# Altium PCB KRing_B4.PcbDoc
Units mil, origin at the board's own origin, x right, y up, seen from the top; angles counter-clockwise.
Board outline 1488.19 x 1488.19 mil, 2 copper layers (Top Layer, Bottom Layer); 78 components, 48 nets, 279 pads, 213 vias.
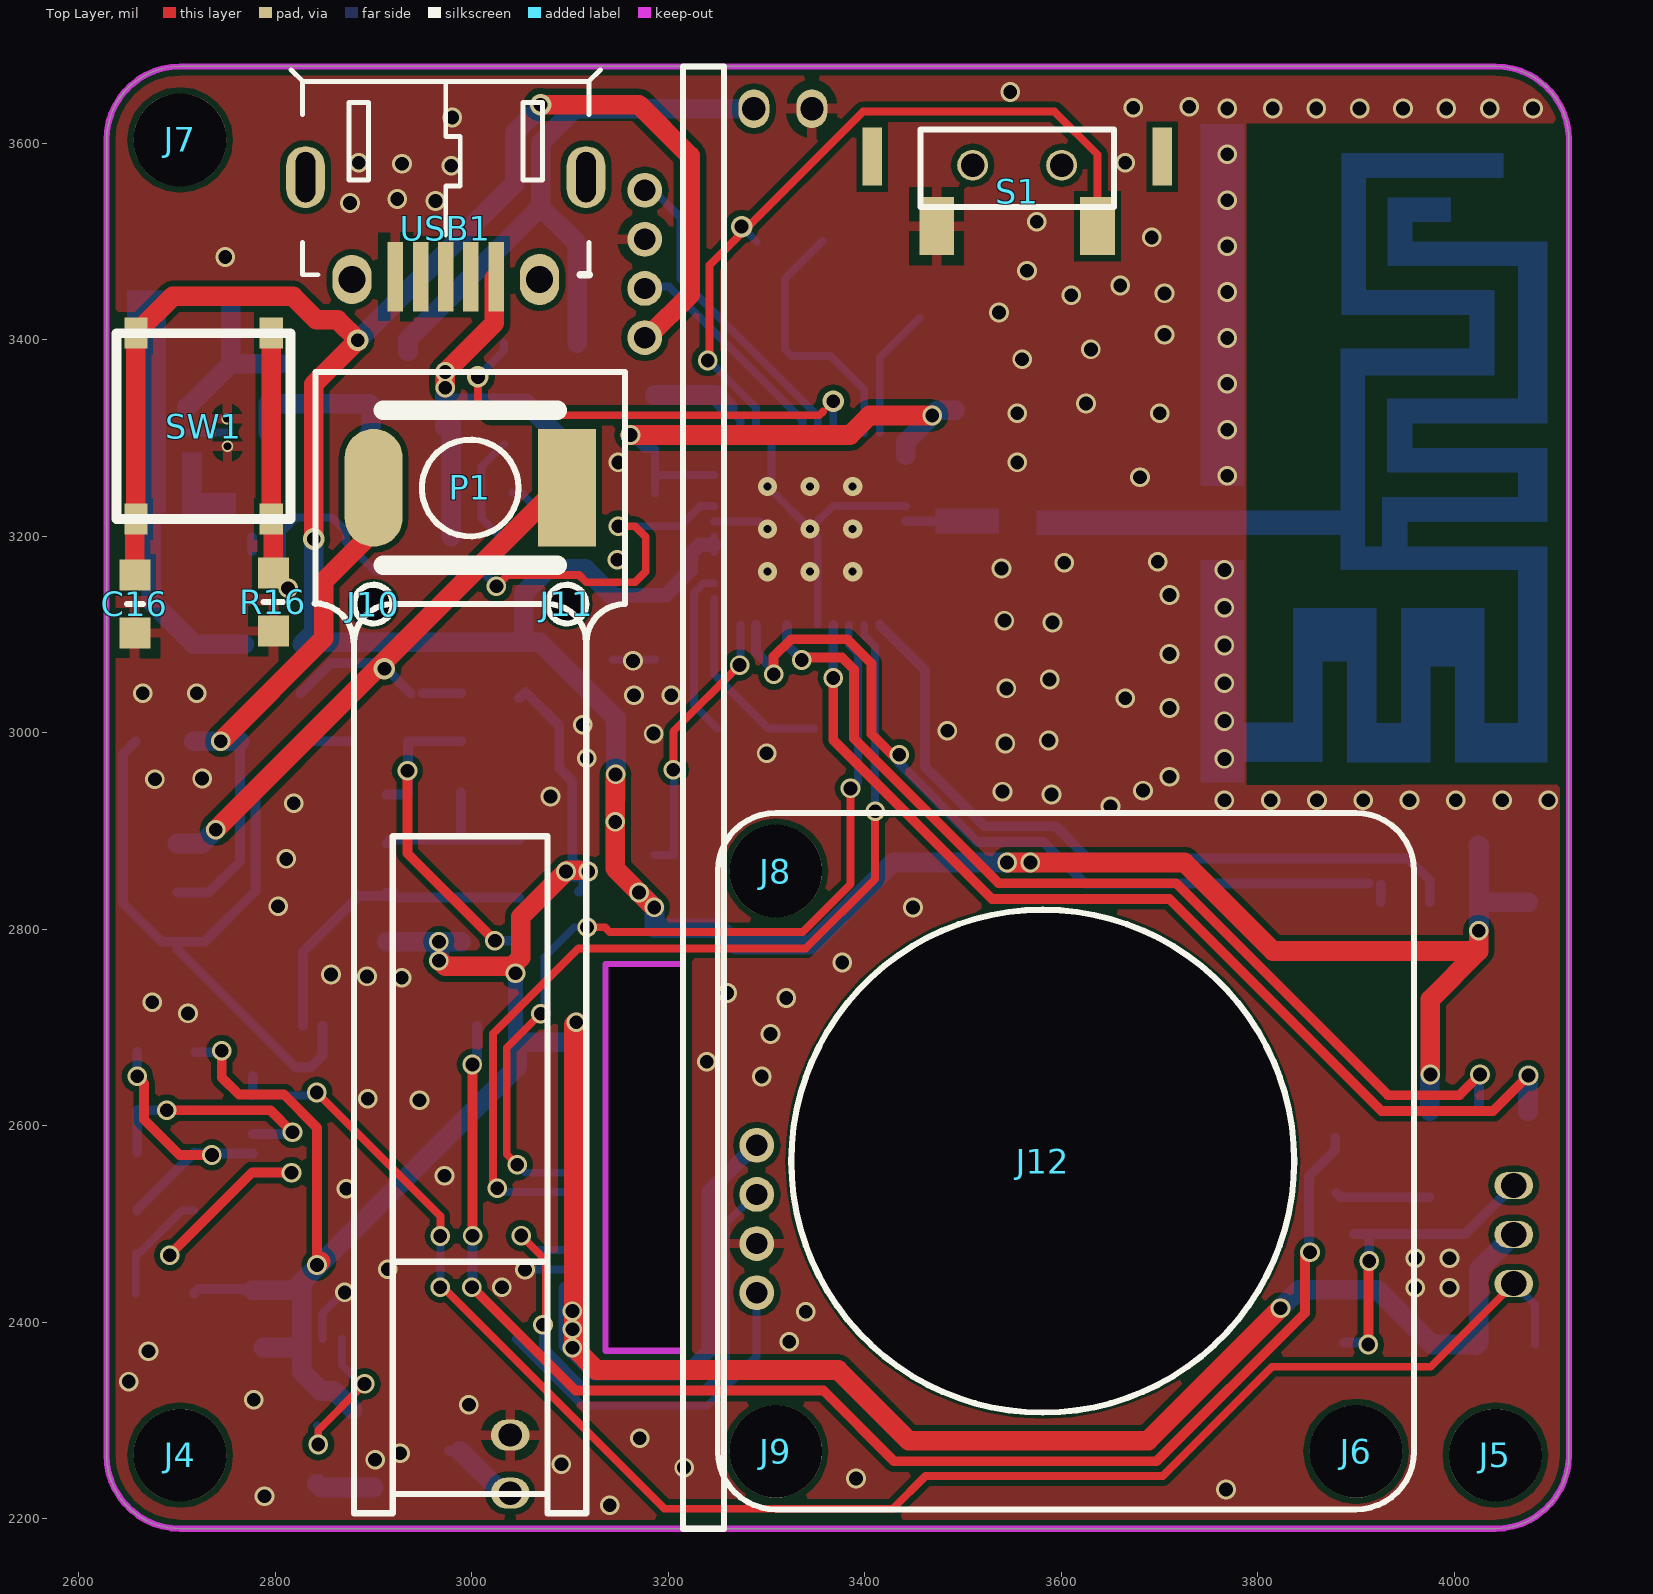
[diagram p0: Top Layer view]
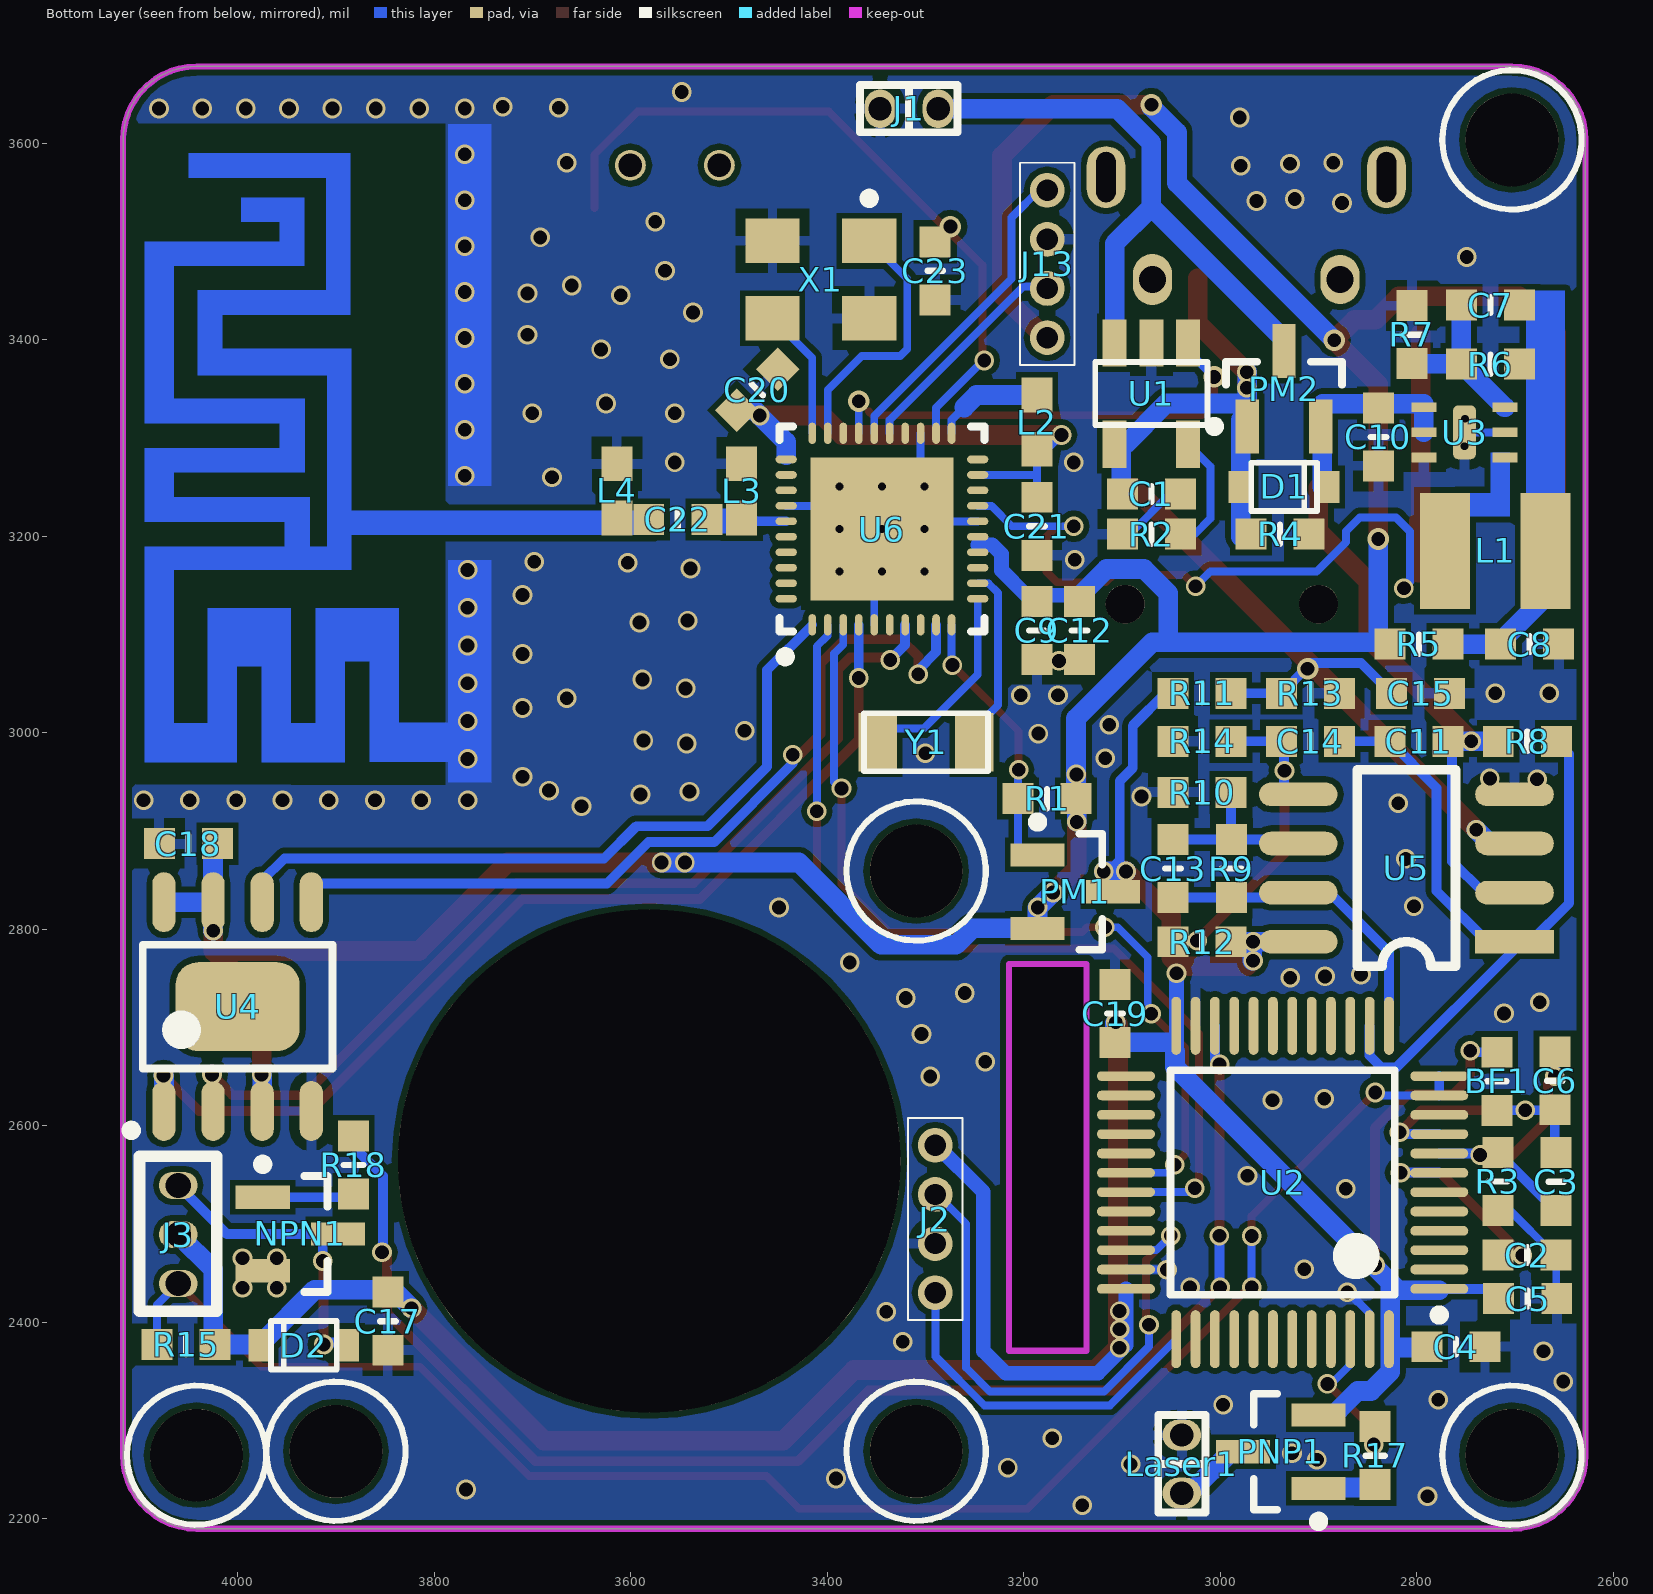
[diagram p1: Bottom Layer view, seen from below]

## Layer stack, top to bottom
Top Layer: signal copper 1.4
Dielectric: dielectric 12.6, FR-4, Dk 4.8
Bottom Layer: signal copper 1.4

## Board outline
2628.27,2264.65 2628.27,3603.23 cw(c2703.07,3603.23) 2703.07,3678.03 4041.65,3678.03 cw(c4041.65,3603.23) 4116.46,3603.23 4116.46,2264.65 cw(c4041.65,2264.65) 4041.65,2189.84 2703.07,2189.84 cw(c2703.07,2264.65)
cut-out: 3136.47,2764.19 3215.47,2764.19 3215.47,2371.19 3136.47,2371.19

## Design rules (kind name [scope] priority, off if disabled: settings)
Clearance "6mil Special" [(HasFootprint('FPC 0.5mm 4P') OR HasFootprint('FPC 0.5mm 16P') OR HasFootprint('QFN40P500X500X90_HS-41L'))] p1: gap=6
Clearance "8mil all" [All] p2: gap=6
ComponentClearance [All] p1: gap=-3937.01 collisioncheckmode=3 verticalgap=10 showdistances=FALSE
Height [All] p1: minheight=0 maxheight=2000 prefheight=500
HoleSize [All] p1: absolutevalues=TRUE maxlimit=71537.31 minlimit=0 maxpercent=80.000 minpercent=20.000
HoleToHoleClearance [All] p1: gap=8 allowstackedmicrovias=TRUE
MinimumSolderMaskSliver [All] p1: minsoldermaskwidth=0
PolygonConnect PolygonConnect_1 [isvia] p1: connectstyle=Direct reliefconductorwidth=10 reliefentries=4 polygonreliefangle="90 Angle" airgapwidth=10
PolygonConnect [All] p2: connectstyle=Relief reliefconductorwidth=10 reliefentries=4 polygonreliefangle="90 Angle" airgapwidth=10
RoutingCorners [All] p1: cornerstyle=45-Degree minsetback=10 maxsetback=100
RoutingVias [All] p1: holewidth=14 width=20 viastyle="Through Hole" minholewidth=14 minwidth=20 maxholewidth=100 maxwidth=200
SilkToSilkClearance [All] p1: silktosilkclearance=0
SilkToSolderMaskClearance [IsPad] p1: minsilkscreentomaskgap=0 clearancetoexposedcopper=TRUE
SolderMaskExpansion [All] p1: expansion=4
Width 20mil_Power [(InNet('EP_SUPPLY&VBAT') OR InNet('PSUPPLY') OR InNet('P_3.3V') OR InNet('PSUPPLYBAT') OR InNet('P_3.3V') OR InNet('P_5V'))] p1: maxlimit=39370.08 minlimit=8 preferedwidth=20
Width 8mil_Basic [All] p2: maxlimit=3937.01 minlimit=8 preferedwidth=10
20 further rules are at their usual default settings.

## Components (designator, comment, footprint, x,y, rotation, side; value= is the part's Value field where it differs from the comment)
BF1 "BF" R0603 2718.47,2645.19 r90 bottom
C1 "1uf" C0603 3070,3243 r180 bottom
C2 "1uf" C0603 2687.53,2468.19 r0 bottom
C3 "1uf" C0603 2658,2543 r90 bottom (schematic designator C4)
C4 "1uf" C0603 2760,2375 r0 bottom
C5 "1uf" C0603 2687,2424 r0 bottom (schematic designator C7)
C6 "0.1uf" C0603 2659.47,2645.71 r270 bottom (schematic designator C21)
C7 "22pf" C0603 2725,3435 r0 bottom
C8 "1uf" C0603 2685,3090 r180 bottom
C9 "1uf" C0603 3186.47,3104 r270 bottom
C10 "6.8pF" C0603 2839,3301 r270 bottom
C11 "1uf" C0603 2797.8,2991.19 r180 bottom
C12 "10uf" C0603 3143,3104 r90 bottom
C13 "240pF" C0603 3048,2861.71 r90 bottom
C14 "0.15uf" C0603 2908.13,2991.19 r180 bottom
C15 "10uf" C0603 2796,3040 r180 bottom
C16 "1uf" C0603 2657,3131 r270 top
C17 "1uf" C0603 3847,2401 r270 bottom
C18 "10uf" C0603 4050,2887 r180 bottom
C19 "10uf" C0603 3107,2714 r270 bottom
C20 "1uf" C0603 3471,3349 r135 bottom
C21 "1uf" C0603 3186.47,3210 r270 bottom
C22 "10uf" C0603 3552,3217 r0 bottom
C23 "10uf" C0603 3290,3470 r90 bottom
D1 "1N5817" SOD323(0805) 2935,3250 r180 bottom
D2 "1N5817" SOD323(0805) 3932.6,2376.54 r0 bottom
J1 "CON2" BATTRY_CONNECTOR 3287,3635 r0 bottom
J2 "CON4" "CON4 1MM" 3290,2505 r90 bottom
J3 "CON3" "Motor Connector" 4060.38,2489.23 r270 bottom
J4 "CON1" 2.4mm#1 2703.07,2264.19 r0 top
J5 "CON1" 2.4mm#2 4045.47,2264.19 r0 top
J6 "CON1" 2.4mm#3 3901.47,2271.19 r0 top
J7 "CON1" 2.4mm#4 2706.47,3604.19 r0 top
J8 "CON1" 2.4mm#5 3309.47,2859.19 r0 top
J9 "CON1" 2.4mm#6 3304.47,2270.19 r0 top
J10 "CON1" 0.5mm 2899.92,3130.79 r0 top
J11 "CON1" 0.5mm 3096.77,3130.79 r0 top
J12 "CON1" 6.5mm 3583.47,2566.19 r0 top
J13 "CON4" "CON4 1MM" 3176,3477 r270 bottom
L1 "4.7uh" GDNR3012 2720,3185 r90 bottom
L2 "2.2uh" L0603 3186.47,3316.02 r270 bottom
L3 "NC" L0603 3487,3246 r270 bottom
L4 "NC" L0603 3614,3246 r270 bottom
Laser1 "Laser" BATTRY_CONNECTOR 3039,2226 r90 bottom
NPN1 "8050" SOT23-3 3936,2489.82 r180 bottom
P1 "photodetector" BPW34 2998.47,3249.19 r180 top
PM1 "Si2303" SOT23-3 3147.44,2838.15 r180 bottom
PM2 "Si2303" SOT23-3 2935,3350 r90 bottom
PNP1 "8550" SOT23-3 2938.27,2268.16 r0 bottom
R1 "100K" R0603 3176.18,2932.87 r180 bottom
R2 "20K" R0603 3070,3202 r180 bottom
R3 "0" R0603 2717.47,2543.19 r90 bottom (schematic designator R14)
R4 "1M" R0603 2939,3202 r180 bottom
R5 "50R" R0603 2797.8,3090 r180 bottom
R6 "120K" R0603 2725,3375 r180 bottom
R7 "27K" R0603 2805,3405 r90 bottom
R8 "10M" R0603 2687.47,2991.19 r180 bottom
R9 "220K" R0603 2988.47,2861.71 r270 bottom
R10 "3K" R0603 3018.47,2939.19 r180 bottom
R11 "4K7" R0603 3018.47,3040 r0 bottom (schematic designator R6)
R12 "2M" R0603 3018.47,2787.19 r180 bottom
R13 "1K" R0603 2908.13,3040 r0 bottom
R14 "510" R0603 3018.47,2991.19 r180 bottom
R15 "10K" R0603 4052.38,2377.23 r180 bottom
R16 "1K" R0603 2798,3133 r270 top
R17 "1K" R0603 2842.27,2264.16 r90 bottom
R18 "1K" R0603 3882,2560 r90 bottom
S1 "SW_Mini" SW_Mini 3555,3566.54 r180 top
SW1 "SW_MINI2" SW_MINI2 2727,3312 r270 top
U1 "LTC4054" LTC4054 3070,3345 r0 bottom
U2 "STM32F103C8T6" TSQFP50P900X900X160-48L 2936.47,2542.19 r0 bottom
U3 "TPS62260" QFN2X2-6 2710,3280 r0 bottom
U4 "W25X20CLSNIG" SOIC8 3999.92,2721.18 r90 bottom
U5 "LMC6482" LMC6482 2700.47,2787.19 r0 bottom
U6 "DA14580-01AT1" QFN40P500X500X90_HS-41L 3344.21,3207.17 r90 bottom
USB1 "MicroUSB" MICROUSB 2973.47,3513.19 r270 top locked
X1 "3225 16Mhz" 3225 3406.38,3461.06 r270 bottom
Y1 "FC-135" FC-135 3299.37,2990.2 r0 bottom

## Footprints (in the part's own frame and the unit in brackets; to place one, negate y for a bottom-side part, rotate by r counter-clockwise, add the part's x,y. Pads: shape width x height; smd on the part's side, far side on the other; paste and mask are expansions set on the pad)
0.5mm [mm]
  round 1 hole 1: 1(0,0)
2.4mm#1 [mm]
  round 2.4 hole 2.4: 1(0,0.012)
2.4mm#2 [mm]
  round 2.4 hole 2.4: 1(-0.097,0.012)
2.4mm#3 [mm]
  round 2.4 hole 2.4: 1(-0.039,-0.066)
2.4mm#4 [mm]
  round 2.4 hole 2.4: 1(-0.086,-0.024)
2.4mm#5 [mm]
  round 2.4 hole 2.4: 1(-0.002,-0.001)
2.4mm#6 [mm]
  round 2.4 hole 2.4: 1(0.125,-0.041)
6.5mm [mm]
  round 13 hole 13 unplated: ""(-0.062,-0.059)
3225 [mm]
  rect 1.15x1.4 smd: 1(-1,1.25) 2(-1,-1.25) 3(1,-1.25) 4(1,1.25)
  silkscreen extent -2.22,1.13 -1.98,1.37, body extent -1.25,-1.6 1.25,1.6, height 0.7
BATTRY_CONNECTOR [mm]
  oval 0.8x1 hole 0.6: 1(0,0) 2(1.5,0)
  silkscreen extent -0.5,-0.61 2.02,0.61
BPW34 [mm]
  rect 1.5x3.048 smd: A(-2.5,0)
  oval 1.5x3.048 smd: C(2.5,0)
  silkscreen extent -2.25,-2 2.25,2
C0603 [mm]
  rect 0.8x0.8 smd: 1(-0.75,0) 2(0.75,0)
  silkscreen extent 0,-0.2 0,0.2, body extent -0.8,-0.4 0.8,0.4, height 0.8
"CON4 1MM" [mm]
  round 0.9 hole 0.55: 1(-1.905,0) 2(-0.635,0) 3(0.635,0) 4(1.905,0)
  silkscreen extent -2.62,-0.7 2.62,0.7
FC-135 [mm]
  rect 1x1.5 smd: 1(-1.25,0) 2(1.25,0)
  silkscreen extent -1.6,-0.75 1.6,0.75, body extent -1.6,-0.75 1.6,0.75, height 0.8
GDNR3012 [mm]
  rect 3x1.3 smd: 1(0,1.3) 2(0,-1.3)
  body extent -1.5,-1.5 1.5,1.5, height 1.2
L0603 [mm]
  rect 0.9x0.8 smd: 1(-0.7,0) 2(0.7,0)
  body extent -0.8,-0.4 0.8,0.4, height 0.8
LMC6482 [mil]
  rect 80x24 smd: 1(0,0)
  oval 80x24 smd: 2(0,-50) 3(0,-100) 4(0,-150) 5(220,-150) 6(220,-100) 7(220,-50) 8(220,0)
  silkscreen extent 60,-175 160,25, body extent 24,-176 196,27, height 43
LTC4054 [mm] "TSQFP, 48-Leads, Body 7.00x7.00mm, Pitch 0.50mm, IPC High Density"
  rect 0.62x1.22 smd: 1(-0.95,-1.31) 2(0,-1.31) 3(0.95,-1.31) 4(0.95,1.31) 5(-0.95,1.31)
  silkscreen extent -1.45,-0.81 1.45,0.81, body extent -1.45,-0.82 1.45,0.81, height 1
MICROUSB [mm]
  oval 1.6x1 hole 0.5 slot 1.3 at 0 deg unplated: 0(-1.325,3.625) 0(-1.325,-3.625)
  rect 1.8x0.4 smd: 1(1.25,1.3) 2(1.25,0.65) 3(1.25,0) 4(1.25,-0.65) 5(1.25,-1.3)
  oval 1.321x1.016 hole 0.7 unplated: ""(1.325,2.425)
  oval 1.27x1.016 hole 0.7 unplated: ""(1.325,-2.425)
  silkscreen extent -4.1,-4 1.2,4, body extent -3.62,-3.96 1.81,4.02, height 2.99
"Motor Connector" [mm]
  oval 0.7x1 hole 0.65: 1(-1.27,0) 2(0,0) 3(1.27,0)
  silkscreen extent -2.02,-1 1.98,1
QFN2X2-6 [mm]
  rect 0.65x0.25 smd: 1(0,0) 2(0,-0.65) 3(0,-1.3) 4(2.1,-1.3) 5(2.1,-0.65) 6(2.1,0)
  round 0.3 hole 0.2: 7(1.04,-1) 7(1.05,-0.29)
  rrect50% 0.6x1.4 smd: 7(1.05,-0.65)
  body extent 0.22,-1.59 1.86,0.29, height 0.8
QFN40P500X500X90_HS-41L [mm] "QFN, 40-Leads, Body 5.00x5.00mm, Pitch 0.40mm, Thermal Pad 3.70x3.70mm, IPC High Density"
  oval 0.55x0.2 smd: 1(-2.475,1.8) 2(-2.475,1.4) 3(-2.475,1) 4(-2.475,0.6) 5(-2.475,0.2) 6(-2.475,-0.2) 7(-2.475,-0.6) 8(-2.475,-1) 9(-2.475,-1.4) 10(-2.475,-1.8) 21(2.475,-1.8) 22(2.475,-1.4) 23(2.475,-1) 24(2.475,-0.6) 25(2.475,-0.2) 26(2.475,0.2) 27(2.475,0.6) 28(2.475,1) 29(2.475,1.4) 30(2.475,1.8)
  oval 0.2x0.55 smd: 11(-1.8,-2.475) 12(-1.4,-2.475) 13(-1,-2.475) 14(-0.6,-2.475) 15(-0.2,-2.475) 16(0.2,-2.475) 17(0.6,-2.475) 18(1,-2.475) 19(1.4,-2.475) 20(1.8,-2.475) 31(1.8,2.475) 32(1.4,2.475) 33(1,2.475) 34(0.6,2.475) 35(0.2,2.475) 36(-0.2,2.475) 37(-0.6,2.475) 38(-1,2.475) 39(-1.4,2.475) 40(-1.8,2.475)
  rect 3.7x3.7 smd: 41(0,0)
  silkscreen extent -3.42,-2.65 2.65,2.65, body extent -2.5,-2.5 2.5,2.5, height 0.9
R0603 [mm]
  rect 0.8x0.8 smd: 1(-0.75,0) 2(0.75,0)
  silkscreen extent 0,-0.25 0,0.25, body extent -0.8,-0.4 0.8,0.4, height 0.5
SOD323(0805) [mm]
  rect 0.63x0.83 smd: A(-1.115,0) C(1.115,0)
  silkscreen extent -0.85,-0.63 0.85,0.63, body extent -0.85,-0.63 0.86,0.63, height 1.1
SOIC8 [mm] "QFN, 40-Leads, Body 5.00x5.00mm, Pitch 0.40mm, Thermal Pad 3.70x3.70mm, IPC High Density"
  oval 1.55x0.6 smd: 1(-2.7,1.905) 2(-2.7,0.635) 3(-2.7,-0.635) 4(-2.7,-1.905) 5(2.7,-1.905) 6(2.7,-0.635) 7(2.7,0.635) 8(2.7,1.905)
  rrect50% 2.3x3.2 smd: 9(0,0)
  silkscreen extent -3.32,-2.45 1.6,2.88, body extent -1.65,-2.41 1.65,2.41, height 1.35
SOT23-3 [mm]
  rect 1.4x0.6 smd: 1(-0.975,0.95) 2(-0.975,-0.95) 3(0.975,0)
  silkscreen extent -1.1,-1.5 0.7,1.92, body extent -0.7,-1.5 0.7,1.5, height 1
SW_Mini [mm]
  rect 0.9x1.5 smd: 1(2.08,1.3) 2(-2.08,1.3)
  rect 0.5x1.5 smd: ""(-3.75,-0.5) ""(3.75,-0.5)
  round 0.8 hole 0.6: ""(-1.15,-0.277) ""(1.15,-0.277)
  silkscreen extent -2.5,-1.2 2.5,0.8, body extent -3.76,-2.28 3.74,1.72, height 3.4
SW_MINI2 [mm]
  rect 0.8x0.6 smd: 1(-2.4,1.75) 2(2.4,1.75) 3(-2.4,-1.75) 4(2.4,-1.75)
  silkscreen extent -2.4,-2.25 2.4,2.25, body extent -2.4,-2.28 2.4,2.25, height 0.5
TSQFP50P900X900X160-48L [mm] "TSQFP, 48-Leads, Body 7.00x7.00mm, Pitch 0.50mm, IPC High Density"
  oval 1.5x0.25 smd: 1(-4.05,2.75) 2(-4.05,2.25) 3(-4.05,1.75) 4(-4.05,1.25) 5(-4.05,0.75) 6(-4.05,0.25) 7(-4.05,-0.25) 8(-4.05,-0.75) 9(-4.05,-1.25) 10(-4.05,-1.75) 11(-4.05,-2.25) 12(-4.05,-2.75) 25(4.05,-2.75) 26(4.05,-2.25) 27(4.05,-1.75) 28(4.05,-1.25) 29(4.05,-0.75) 30(4.05,-0.25) 31(4.05,0.25) 32(4.05,0.75) 33(4.05,1.25) 34(4.05,1.75) 35(4.05,2.25) 36(4.05,2.75)
  oval 0.25x1.5 smd: 13(-2.75,-4.05) 14(-2.25,-4.05) 15(-1.75,-4.05) 16(-1.25,-4.05) 17(-0.75,-4.05) 18(-0.25,-4.05) 19(0.25,-4.05) 20(0.75,-4.05) 21(1.25,-4.05) 22(1.75,-4.05) 23(2.25,-4.05) 24(2.75,-4.05) 37(2.75,4.05) 38(2.25,4.05) 39(1.75,4.05) 40(1.25,4.05) 41(0.75,4.05) 42(0.25,4.05) 43(-0.25,4.05) 44(-0.75,4.05) 45(-1.25,4.05) 46(-1.75,4.05) 47(-2.25,4.05) 48(-2.75,4.05)
  silkscreen extent -4.17,-2.9 2.9,3.55, body extent -3.5,-3.5 3.5,3.5, height 1.6

## Part data
BF1: "磁珠"
C1 C2 C3 C4 C5 C6 C7 C8 C9 C10 C11 C12 C13 C14 C15 C16 C17 C18 C19 C20 C21 C22 C23: library part C
D1 D2: library part Diode
L1 L2 L3 L4: library part L
NPN1: library part NPN
PM1 PM2: library part PMOS
PNP1: library part PNP
R1 R2 R3 R4 R5 R6 R7 R8 R9 R10 R11 R12 R13 R14 R15 R16 R17 R18: library part R

## Via types
v1: diameter 20, hole 14, Top Layer to Bottom Layer, 197 vias
v2: diameter 19.68, hole 7.87, Top Layer to Bottom Layer, 9 vias
v3: diameter 22, hole 14, Top Layer to Bottom Layer, 7 vias

## Nets (pads, with @x,y where several pads share a name; then routed paths per layer and width w, separated by ;. In a path a pad name is that pad's centre, name@x,y a point inside that pad or via, vN(x,y) a via of type N, cw(c..) or ccw(c..) an arc to the next point about the centre after c; other vN are vias at no path point)
AGND: C3.1 C6.1 R3.2 U2.8 | length 300.5
  Top Layer w10: v1(2659.47,2650.19) 2666.47,2643.19 2666.47,2606.13 2702.41,2570.19 v1(2735.47,2570.19)
  Bottom Layer w10: C3.1@2659.47,2513.66 2659.47,2514.71 R3.2 2718.47,2571.71 v1@2735.47,2571.71 ; v1(2659.47,2650.19) C6.1 ; v1(2735.47,2570.19) v1@2735.47,2571.71 ; U2.8 v1@2735.47,2571.71
C_LASER: R17.2 U2.46 | length 158.3
  Top Layer w8: v1(2843.7,2275.55) 2843.7,2290.05 v1(2890.86,2337.21)
  Bottom Layer w8: R17.2@2842.47,2294.71 2843.7,2293.48 v1(2843.7,2275.55) ; U2.46 2867.57,2356.71 2887.07,2337.21 v1(2890.86,2337.21)
C_MOTOR: R18.2 U2.22 | length 1443.7
  Top Layer w10: v1(3000.04,2435.68) 3105.38,2330.34 3357.93,2330.34 3429.78,2258.49 3696.93,2258.49 3847.93,2409.49 3847.93,2466.06 v1(3852.93,2471.06) ; v1(3000.55,2662.27) 3000.55,2488.19 v1(3000.79,2487.95)
  Bottom Layer w10: v1(3000.04,2435.68) 3000.79,2436.42 v1(3000.79,2487.95) ; v1(3000.55,2662.27) 3005.37,2667.08 U2.22 ; v1(3852.93,2471.06) 3851.95,2472.04 3851.95,2548.65 3878.7,2575.4 R18.2@3878.7,2587.4
CHARGE_STATES: U1.1 U6.27 | length 462.3
  Top Layer w8: v3(3006.18,3362) 3006.18,3335.82 3019.05,3322.95 3353.62,3322.95 3357.33,3326.67
  Bottom Layer w8: v3(3006.18,3362) 3032.6,3388.41 U1.1 ; U6.27 v3(3367.83,3337.17)
DA_RXD: U2.30 U6.3 | length 909.1
  Top Layer w8: v1(3046.22,2560.16) 3035.51,2570.87 3035.51,2679.18 v1(3070.17,2713.84) ; v1(3117.28,2801.93) 3135.43,2801.93 3140.4,2796.96 3336.57,2796.96 3385.39,2845.78 v1(3385.39,2943.23)
  Bottom Layer w8: v1(3046.22,2560.16) 3054.35,2552.03 U2.30 ; v1(3070.17,2713.84) 3073.74,2717.41 3073.74,2771.38 3104.29,2801.93 v1(3117.28,2801.93) ; 3383.58,3096.22 3383.58,3089.7 ; U6.3 3383.58,3089.7 ; v1(3385.39,2943.23) 3386.32,2943.23 3392.91,2949.83 3392.91,3080.37 3383.58,3089.7
DA_TXD: U2.31 U6.2 | length 948.1
  Top Layer w8: v1(3025.83,2536.42) 3021.51,2540.73 3021.51,2693.48 3108.5,2780.47 3339.88,2780.47 3410.43,2851.02 v1(3410.43,2919.98)
  Bottom Layer w8: v1(3025.83,2536.42) 3029.9,2532.34 U2.31 ; U6.2 3399.33,3098.87 3410.43,3087.77 v1(3410.43,2919.98)
EVCC: C1.1 D1.A PM2.1 R4.1 U1.4 USB1.1 | length 518.3
  Top Layer w20: v1(2973,3351) v1(2973,3367) 3022.93,3416.93 USB1.1@3022.93,3462.26
  Bottom Layer w20: PM2.1 v1@2972.4,3367 ; PM2.1@2973,3324.01 2978.9,3318.11 D1.A R4.1@2978.9,3199.37 ; PM2.1@2973,3335 3055,3335 3096.57,3293.43 U1.4 3100.53,3286.55 C1.1@3100.53,3244
F_CLK: U4.6 U6.1 | length 747.3
  Bottom Layer w10: U6.1 3461.02,3063.78 3461.02,2965.32 3521.58,2904.76 3594.29,2904.76 3627.05,2872.01 3952.36,2872.01 3974.92,2849.45 U4.6
F_CS: U4.1 U6.4 | length 1032.4
  Top Layer w10: v1(3367.88,3055.56) 3367.88,2992.28 3529.39,2830.76 3710.02,2830.76 3925.74,2615.05 4039.38,2615.05 v1(4075.35,2651.02)
  Bottom Layer w10: U6.4 3367.88,3109.68 v1(3367.88,3055.56)
  Bottom Layer w20: U4.1 4074.92,2650.59 v1(4075.35,2651.02)
F_MISO: U4.2 U6.7 | length 1005.5
  Top Layer w10: v1(3335.87,3073.98) 3338.45,3076.56 3376.58,3076.56 3388.88,3064.26 3388.88,2993.91 3536.02,2846.76 3716.65,2846.76 3932.37,2631.05 4005.02,2631.05 v1(4026.06,2652.09)
  Bottom Layer w10: U6.7 3320.59,3089.25 v1(3335.87,3073.98) ; U4.2 4024.92,2650.94 v1(4026.06,2652.09)
F_MOSI: U4.5 U6.9 | length 857.3
  Top Layer w10: v1(3307.17,3059.33) 3307.17,3077.52 3324.62,3094.98 3382.23,3094.98 3406.68,3070.52 3406.68,2998.73 3427.98,2977.43 v1(3435.1,2977.43)
  Bottom Layer w10: U6.9 3289.09,3081.89 3307.17,3063.82 v1(3307.17,3059.33) ; v1(3435.1,2977.43) 3435.1,2968.45 3514.79,2888.76 3581.67,2888.76 3624.13,2846.3 3912.6,2846.3 ; U4.5 U4.5@3924.92,2845.71
GND: C1.2 C2.1 C4.1 C5.1 C8.2 C9.2 C10.2 C12.1 C15.2 C16.2 C17.2 C18.1 C19.1 C20.2 C21.2 C23.1 J1.2 J2.2 J13.2 L3.1 L4.1 Laser1.2 NPN1.2 R2.1 R3.1 R4.2 R7.2 R10.1 R13.1 R14.1 R16.2 S1.1 U1.2 U2.23 U2.35 U2.47 U3.2 U3.6 U3.7 U4.4 U5.4 U6.5 U6.16 U6.23 U6.34 U6.41 USB1.5 X1.2 X1.4 | length 757.6
  Bottom Layer w8: C5.1@2657.94,2429.19 2657.94,2470.19 2661.63,2470.19 2705.11,2513.66 R3.1 ; U3.2 U3.7@2751.34,3305.59 ; U2.47 2847.89,2408.76 2869.44,2430.32 v1(2870.71,2430.32) ; C1.2@3041.47,3244 3049.97,3244 3091.97,3202 R2.1 ; v1(3054.14,2453.25) 3054.49,2453.6 U2.35 ; C12.1 C9.2 ; U6.16 3293.03,3215.04 v2(3300.91,3207.17) ; U6.23 3304.84,3246.54 v2(3344.21,3207.17) ; U6.5 3352.09,3199.29 v2(3344.21,3207.17) ; U6.34 3367.83,3230.79 v2(3344.21,3207.17)
  other v1: 3140.35,2213.58 2788.94,2222.83 3767.48,2229.69 3391,2241 3216,2252 3091.14,2255.55 2901.54,2260.12 2926.93,2266.65 3171,2282 2997,2316 2777.95,2321.06 2650.91,2339.57 2670.94,2370.35 3323,2380 3339.84,2410.55 3030.59,2435.47 3960,2435 3995,2435 2914.33,2453.9 3960,2465 3995,2465 2872.2,2535.75 2972.2,2549.06 2946.81,2625.83 2894.02,2627.28 3295,2650 3239,2665 3303.9,2693.27 2711.1,2714.25 2674.65,2725.71 3320,2730 3260,2735 2928.78,2750.63 2893.31,2751.93 2856.73,2753.9 3377,2766 3449,2822 2802.83,2823.19 2811.02,2871.5 3650,2925 2818.82,2928.03 3765.91,2931.26 3813.01,2931.26 3860.11,2931.26 3907.22,2931.26 3954.32,2931.26 4001.42,2931.26 4048.53,2931.26 4095.63,2931.26 3080,2935 3590,2937 3540,2940 3683,2941 2677.44,2952.56 2725.51,2953.31 3710,2955 3765.91,2973.27 3117,2974 3300,2979 3543,2989 3587,2992 3185,2999 3484,3002 3113,3008 3765.91,3011.73 3710,3025 3665,3035 3165,3038 3203,3038 2665,3040 2720,3040 3544,3045 3765.91,3050.2 3588,3054 3164,3073 3710,3080 3765.91,3088.66 3591,3112 3542,3114 3765.91,3127.13 3710,3140 3765.91,3165.59 3539,3167 3603,3173 3698,3174 3148,3176 3680,3260 3768.78,3261.54 3149,3275 3555,3275 3768.78,3308.25 3555,3325 3700,3325 3625,3335 3768.78,3354.96 3560,3380 3630,3390 3768.78,3401.67 3705,3405 3536.46,3427.56 3610,3445 3705,3447 3768.78,3448.39 3660,3455 3565,3470 2749,3484 3768.78,3495.1 3692,3504 3575,3520 2876,3539 2963,3541 3768.78,3541.81 2924,3543 2979,3577 2929,3579 2885,3580 3665,3580 3768.78,3588.52 2980,3626 3768.78,3635.24 3815.2,3635.24 3859.33,3635.24 3903.46,3635.24 3947.6,3635.24 3991.73,3635.24 4035.87,3635.24 4080,3635.24 3673,3636 3730,3637 3548,3652
  other v2: 3300.91,3163.86 3344.21,3163.86 3387.52,3163.86 3387.52,3207.17 3300.91,3250.47 3344.21,3250.47 3387.52,3250.47
LASER_STATE: PM1.1 R1.1 U6.10 | length 282.6
  Top Layer w8: v1(3205.08,2962.2) 3205.08,3001.27 v1(3272.53,3068.72)
  Bottom Layer w8: PM1.1 3205.71,2875.55 R1.1 3205.71,2961.57 v1(3205.08,2962.2) ; v1(3272.53,3068.72) 3273.35,3069.53 U6.10
M_SIG: J3.3 R15.1 U2.11 U2.12 | length 1687.9
  Top Layer w8: v1(2842.17,2633.78) 2967.97,2507.98 v1(2967.97,2487.73) ; v1(2967.97,2435.68) 2970.62,2435.68 3196.1,2210.2 3428.46,2210.2 3461.76,2243.49 3703.14,2243.49 3814.34,2354.69 3975.84,2354.69 J3.3
  Bottom Layer w8: U2.11 2839.16,2630.77 v1(2842.17,2633.78) ; v1(2967.97,2435.68) v1(2967.97,2487.73) ; J3.3 4081.91,2417.7 R15.1
  Bottom Layer w10: U2.11 U2.12
NetC2_2: C2.2 U2.7 | length 198.3
  Top Layer w10: v1(2692.47,2468.19) 2776.47,2552.19 v1(2816.47,2552.19)
  Bottom Layer w10: U2.7 2777.18,2552.19 v1(2816.47,2552.19)
NetC7_1: C7.1 C8.1 L1.2 R5.2 R6.2 | length 210.3
  Bottom Layer w20: L1.2@2673.82,3231.18 2673.82,3185 2673.82,3133.18 2717,3090 R5.2
NetC7_2: C7.2 R6.1 R7.1 U3.3 | length 171.7
  Bottom Layer w20: U3.3 2710.71,3331.18 R6.1 ; R6.1@2754.53,3375.94 C7.2 ; R6.1@2755,3375.47 R7.1
NetC10_1: C10.1 D1.C PM2.2 U3.4 U3.5 | length 207.3
  Bottom Layer w20: U3.5 U3.4 ; U3.4@2792.68,3334.53 2895.47,3334.53 2897.6,3332.4 PM2.2 ; D1.C@2896.1,3250 PM2.2@2896.1,3305.12
NetC11_2: C11.2 P1.C R8.1 U5.2 | length 568.3
  Top Layer w20: v1(2744.47,2991.19) 2849.47,3096.19 2849.47,3154.19 2900.04,3204.76 P1.C
  Bottom Layer w10: U5.2 2732.19,2837.19 2763.94,2868.94 C11.2@2763.94,2991.19
  Bottom Layer w20: R8.1 v1(2744.47,2991.19) C11.2@2763.94,2991.19
NetC13_2: C13.2 R9.1 R10.2 U5.6 | length 184.3
  Bottom Layer w10: U5.6@2913.47,2887.19 2917.52,2891.24 R9.1 ; R10.2 2988.94,2891.71 R9.1 ; C13.2 R9.1
NetC14_1: C14.1 R12.1 R14.2 U5.5 | length 364.3
  Top Layer w10: v1(2934.47,2961.19) 2934.47,2877.19 v1(3023.47,2788.19)
  Bottom Layer w10: U5.5@2913.47,2937.19 2935,2937.19 2935,2991.19 R14.2 ; v1(3023.47,2788.19) 3047,2788.19 R12.1
NetC20_1: C20.1 C21.1 L2.2 U6.19 U6.31 | length 529
  Top Layer w20: v1(3161.5,3302.95) 3384.88,3302.95 3404.65,3322.72 v1(3468.62,3322.72)
  Bottom Layer w8: v1(3161.5,3302.95) 3175.98,3288.46 L2.2 3186.47,3262.28 ; C21.1@3186.47,3243.19 3186.47,3262.28 ; U6.19 3186.47,3262.28
  Bottom Layer w20: 3441.65,3282.22 3441.65,3295.75 v1(3468.62,3322.72) 3474.03,3328.12 C20.1
NetC22_1: C22.1 L3.2 U6.35 | length 32
  Bottom Layer w10: U6.35 3471.81,3215.04 L3.2@3472.05,3215.28 ; L3.2@3480.71,3214.8 L3.2@3481.77,3213.74
NetC22_2: C22.2 L4.2
NetD2_A: D2.A J3.1 NPN1.3 | length 337.7
  Top Layer w10: v1(3912.38,2377.23) 3912.38,2461.23 v1(3913.38,2462.23)
  Bottom Layer w10: D2.A@3887.48,2379.23 3910.38,2379.23 v1(3912.38,2377.23) ; v1(3913.38,2462.23) 3913.38,2489.82 NPN1.3 4010.98,2489.82 J3.1
NetL1_1: L1.1 U3.1 | length 13.8
  Bottom Layer w10: L1.1@2776.18,3185 L1.1@2776.18,3198.82
NetL2_1: L2.1 U6.21 | length 111
  Bottom Layer w8: 3260.59,3330.91 3273.35,3318.15 U6.21
  Bottom Layer w20: L2.1 3247.91,3343.58 3260.59,3330.91
NetLaser1_1: Laser1.1 PNP1.3 | length 80
  Bottom Layer w10: PNP1.3@2976.85,2269.19 PNP1.3@2988,2269.19
  Bottom Layer w20: PNP1.3@2988,2269.19 3031.19,2226 Laser1.1
NetNPN1_1: NPN1.1 R18.1 | length 96.1
  Bottom Layer w10: R18.1@3879.91,2531.23 3883.91,2527.23 NPN1.1
NetPNP1_1: PNP1.1 R17.1 | length 59.2
  Bottom Layer w20: R17.1@2842.47,2235.66 2846.34,2231.79 PNP1.1@2900.08,2231.79
NetR2_2: R2.2 U1.5 | length 121.9
  Bottom Layer w8: U1.5 3010,3270.83 3010,3218 3026,3202 R2.2
NetR16_1: R16.1 SW1.1 SW1.2 U6.17 | length 924
  Top Layer w8: R16.1 2812,3148.53 2812,3146 v1(2813,3147) ; v1(3025,3149) 3036.47,3160.47 3109.07,3160.47 3116.54,3153 3166,3153 3177,3164 3177,3199 3166,3210 v1(3149,3210)
  Top Layer w20: SW1.2 SW1.1 ; R16.1 SW1.2@2798,3215.41
  Bottom Layer w8: v1(2813,3147) 2806.77,3153.23 2806.77,3204.77 2821,3219 2858,3219 2872,3205 2872,3193.83 2901.83,3164 3010,3164 v1(3025,3149) ; v1(3149,3210) 3212,3210 3232.79,3230.79 U6.17
NetU6_11: U6.11 Y1.2 | length 201.2
  Bottom Layer w8: U6.11 3246.77,3059.21 3301.69,3004.29 Y1.2@3348.15,3004.29
NetU6_12: U6.12 Y1.1 | length 172.6
  Bottom Layer w8: U6.12 3235.92,3152.05 3225.94,3142.07 3225.94,3028.07 Y1.1@3249.72,3004.29
NetU6_29: U6.29 X1.1 | length 268.3
  Bottom Layer w8: X1.1 3318.5,3461.77 3318.5,3390.32 3325.55,3383.27 3364.76,3383.27 3399.33,3348.7 U6.29
NetU6_30: U6.30 X1.3 | length 133.9
  Bottom Layer w8: U6.30 3415.08,3381.18 X1.3
NSWCLK: J2.1 U2.37 | length 359.7
  Bottom Layer w8: U2.37 3112.14,2315.33 3239.97,2315.33 3289.69,2365.04 J2.1@3289.69,2431.3
NSWDIO: J2.3 U2.34 | length 581.9
  Top Layer w8: v1(3050.35,2488.12) 3075.35,2463.12 3075.35,2400.28 v1(3072.38,2397.3)
  Bottom Layer w8: v1(3050.35,2488.12) 3065.18,2473.29 U2.34 ; v1(3072.38,2397.3) 3072.38,2375.26 3118.31,2329.33 3234.17,2329.33 3258.5,2353.66 3258.5,2500.11 J2.3@3289.69,2531.3
OUT1: C11.1 C14.2 R8.2 U2.14 U5.1 | length 800.7
  Bottom Layer w10: R8.2 2645,2978.25 2645,2826.3 2684.11,2787.19 U5.1@2697.47,2787.19 ; U2.14 2847.89,2671.37 2835.62,2659.11 2820.78,2659.11 2700.47,2779.42 U5.1 2728.19,2787.19 2779.94,2838.94 2779.94,2943.8 C11.1 C14.2@2875.94,2991.19
OUT2: C13.1 R9.2 U2.13 U5.7 | length 329.1
  Bottom Layer w10: U2.13 2828.2,2776.92 2884.97,2833.69 U5.7@2916.97,2833.69 ; U5.7@2913.47,2837.19 U5.7@2916.97,2833.69 ; U5.7 U5.7@2916.97,2833.69 ; C13.1 R9.2 2918.47,2832.19 U5.7@2916.97,2833.69
P_3.3V: C9.1 C12.2 C16.1 C18.2 J13.4 PM1.2 R1.2 R5.1 SW1.3 SW1.4 U4.3 U4.7 U4.8 U6.14 U6.15 | length 3772.8
  Top Layer w20: C16.1 SW1.4@2657,3216.41 ; SW1.4 SW1.3 2695.61,3444 2818.02,3444 2842,3420.02 2863.36,3420.02 v3(2884,3399.38) 2839,3354.38 v3(2839,3197) ; v3(3070,3639) 3170,3639 3222,3587 3222,3445.59 J13.4@3180.39,3403.98 ; v1(3146.3,2957.48) 3145.91,2957.09 v1(3145.91,2909.17) 3145.91,2861.81 v1(3185.59,2822.13) ; v1(3544.72,2867.76) v1(3568.46,2867.76) 3725.35,2867.76 3815.36,2777.76 4024.65,2777.76 ; v1(3975.51,2652.05) 3975.51,2728.62 4024.65,2777.76 ; v1(4024.65,2798.35) 4024.65,2777.76
  Bottom Layer w8: U6.14 3246.77,3191.02 U6.15
  Bottom Layer w15: C12.2@3142.47,3139.71 3197.19,3139.71 3222.44,3164.96 3222.44,3181.7 3231.97,3191.22 3246.57,3191.22 3246.77,3191.02
  Bottom Layer w20: R5.1 R5.1@2829.33,3092 ; v3(2839,3197) 2839,3101.67 R5.1@2829.33,3092 ; v3(2884,3399.38) 3044,3559.38 3044,3610.77 3070,3636.77 v3(3070,3639) ; C12.2@3142.47,3139.71 3115.71,3166.47 3077.47,3166.47 3053,3142 3053,3092 ; v1(3145.91,2909.17) 3145.91,2932.13 R1.2 3146.65,3014.35 3069,3092 3053,3092 ; v1(3170.12,2837.28) 3185.28,2822.13 v1(3185.59,2822.13) 3185.83,2821.89 PM1.2 3252.25,2800.75 3268.94,2784.06 3345.06,2784.06 3428.76,2867.76 v1(3544.72,2867.76) v1(3568.46,2867.76) ; U4.3 3974.92,2651.46 v1(3975.51,2652.05) ; C18.2@4024.53,2885.16 4024.92,2884.76 U4.7 ; v1(4024.65,2798.35) 4024.92,2798.62 U4.7 ; U4.8 U4.7 ; R5.1@2829.33,3092 3053,3092
P_C3.3V: BF1.2 C4.2 C5.2 C17.1 C19.2 D2.C J2.4 J3.2 PM1.3 PNP1.2 R11.2 R12.2 R15.2 U2.1 U2.24 U2.36 U2.48 U5.8 | length 3640.9
  Top Layer w10: v1(2745.47,2676.19) 2745.47,2649.19 2763,2631.66 2808.69,2631.66 2842.47,2597.89 v1(2842.47,2458.19)
  Top Layer w20: v1(2842.47,2458.19) v1@2845.97,2461.69 ; v1@2967.52,2767.83 2973.17,2762.19 3041.12,2762.19 3049.69,2770.75 3049.69,2812.48 v1(3095.83,2858.62) 3097.09,2859.88 v1@3110,2859.88 ; v1@3103.77,2374.19 3126.61,2351.34 3372.76,2351.34 3444.61,2279.49 3688.23,2279.49 v1(3822.95,2414.21) ; v1@3103.9,2374.06 3103.9,2702.95 v1(3106.22,2705.28)
  Bottom Layer w10: C5.2@2717,2429.19 2721.73,2433.92 U2.1 ; BF1.2 2744,2674.71 v1(2745.47,2676.19) ; v1(2842.47,2458.19) v1@2843.47,2457.19 ; v1(3044.37,2755.04) v1@3044.74,2754.67 ; R11.2@3048,3035 3054.5,3041.5 3089,3007 3089,2963.87 3102.19,2950.69 3102.19,2869.84 3113.4,2858.62 3113.4,2842.5 PM1.3 ; D2.C@3975.28,2379.23 D2.C@3977.28,2377.23 ; R15.2@4022.85,2371.23 R15.2
  Bottom Layer w15: v1(3044.37,2755.04) 3044.37,2676.97 U2.24@3045.98,2675.36 ; U2.36 3095.92,2376.47 3124.43,2347.95 3218.19,2347.95 3241,2370.76 3241,2532.61 J2.4@3289.69,2581.3
  Bottom Layer w20: U2.1@2777.02,2432.68 2818.96,2432.68 2826.96,2440.68 ; C4.2@2788,2374.19 2820,2374.19 ; 2826.96,2441.19 2826.96,2440.68 ; PNP1.2@2878.88,2311.21 2860.09,2330 2846.43,2330 2826.96,2349.47 2826.96,2440.68 ; U5.8@2913.47,2787.19 v1(2966.46,2787.19) ; v1@2967.52,2767.83 2967.52,2786.12 v1(2966.46,2787.19) ; R12.2 v1(2966.46,2787.19) ; U2.24@3045.98,2675.36 3045.98,2659.7 2843.47,2457.19 2826.96,2440.68 ; 3050.43,2684.92 3107.13,2684.92 3107.13,2704.37 v1(3106.22,2705.28) ; v1(3095.83,2858.62) 3113.4,2858.62 v1(3118.43,2858.62) ; v1(3822.95,2414.21) 3841.77,2433.03 3921.47,2433.03 D2.C@3975.28,2379.23 ; D2.C@3977.28,2377.23 R15.2 4024.7,2379.07 4024.7,2453.54 J3.2
  other v1: 3102.32,2374.06 3102.32,2392.72 3102.32,2411.3 2966.46,2767.83
SW_WAKEUP: C23.2 S1.2 U6.22 | length 747
  Top Layer w8: v1(3240,3378.78) 3242,3380.78 3242,3476 3398,3632 3593,3632 3636.89,3588.11 S1.2@3636.89,3533.82
  Bottom Layer w8: v1(3240,3378.78) 3241,3378.78 3289.09,3330.69 U6.22 ; v3(3274.53,3515) C23.2
SWCLK: J13.1 U6.26 | length 322.2
  Bottom Layer w8: J13.1@3179.92,3553.98 3182.5,3553.98 3212.32,3524.15 3212.32,3461.96 3352.09,3322.2 U6.26
SWDIO: J13.3 U6.25 | length 239.1
  Bottom Layer w8: J13.3@3179.92,3453.98 3200.51,3453.98 3336.34,3318.15 U6.25 3336.34,3317.53
V0.58: C15.1 P1.A R11.1 R13.2 U5.3 | length 725.3
  Top Layer w20: v1(2739.47,2901.19) 3087.47,3249.19 P1.A
  Bottom Layer w10: C15.1 2856.53,3071 2906.66,3071 v3@2911,3066.66 ; v3(2911,3065) v3@2911,3066.66 ; R13.2 v3@2911,3066.66 ; R13.2@2949.53,3040 R11.1
  Bottom Layer w20: U5.3 2725.47,2887.19 v1(2739.47,2901.19)
VBAT: J1.1 PM2.3 U1.3 | length 652.9
  Bottom Layer w20: PM2.3 2935,3400 3070,3535 ; U1.3 3107.4,3497.6 3070,3535 ; J1.1 3105,3635 3070,3600 3070,3535
VDDA: BF1.1 C3.2 C6.2 U2.9 | length 281.2
  Top Layer w10: v1(2689.47,2615.66) 2795,2615.66 v1(2817.47,2593.19)
  Bottom Layer w10: C3.2@2659.47,2572.71 C6.2 2660,2615.66 v1(2689.47,2615.66) BF1.1 ; U2.9 2815.68,2591.4 v1(2817.47,2593.19)
pads on no net: J4.1 J5.1 J6.1 J7.1 J8.1 J9.1 J10.1 J11.1 J12. S1. U2.2 U2.3 U2.4 U2.5 U2.6 U2.10 U2.15 U2.16 U2.17 U2.18 U2.19 U2.20 U2.21 U2.25 U2.26 U2.27 U2.28 U2.29 U2.32 U2.33 U2.38 U2.39 U2.40 U2.41 U2.42 U2.43 U2.44 U2.45 U4.9 U6.6 U6.8 U6.13 U6.18 U6.20 U6.24 U6.28 U6.32 U6.33 U6.36 U6.37 U6.38 U6.39 U6.40 USB1. USB1.0 USB1.2 USB1.3 USB1.4

## Polygon pours and split planes (outlines as drawn)
GND on Top Layer "Top Layer-No Net" (solid, remove dead copper, pour order 4): 4396.6,3810.06 2398.1,3810.06 2398.1,2155.13 2403.1,2160.13 4394.12,2160.13
GND on Bottom Layer "Top Layer-No Net" (solid, remove dead copper, pour order 3): 4500.28,3817.14 2501.77,3817.14 2501.77,2162.22 2506.77,2167.22 4497.8,2167.22

## Keep-outs
Keep-Out Layer:
  lines w6.3: 2628.27,2264.65 ccw(c2703.07,2264.65) 2703.07,2189.84 4041.65,2189.84 ccw(c4041.65,2264.65) 4116.46,2264.65 4116.46,3603.23 ccw(c4041.65,3603.23) 4041.65,3678.03 2703.07,3678.03 ccw(c2703.07,3603.23) 2628.27,3603.23 2628.27,2264.65 ; 3136.14,2370.94 3214.88,2370.94 3214.88,2764.65 3136.14,2764.65 3136.14,2370.94

## Other copper
Top Layer:
  pour cut-out: 4151.77,3620.32 3788.11,3620.32 3788.23,2946.46 4151.81,2947.4
Bottom Layer:
  rectangle net GND: 3741.36,2949.46 3785.85,3175.84
  rectangle net GND: 3785.33,2969.93 3865.77,3010.09
  rectangle net GND: 3835.85,3009.23 3865.77,3127.02
  rectangle: 3860.22,3072.3 3920.89,3127.02
  rectangle: 3890.57,2969.54 3920.89,3072.85
  rectangle: 3918.72,2969.58 3975.73,3009.74
  rectangle: 3945.41,2997.73 3975.73,3101.04
  rectangle: 3945.41,3067.22 4030.73,3127.02
  rectangle: 4000.81,2969.54 4030.73,3067.65
  rectangle: 4064.59,2969.58 4094.74,3189.5
  rectangle: 4005.92,2969.54 4091.24,3009.82
  rectangle: 3884.15,3165.49 4088.56,3189.5
  rectangle net NetC22_2: 3884.15,3165.49 3909,3390.68
  rectangle: 3926.4,3165.49 3952.03,3239.82
  rectangle: 3926.4,3214.46 4094.74,3239.82
  rectangle: 4064.51,3214.54 4094.66,3289.66
  rectangle: 3931.63,3264.5 4094.66,3289.74
  rectangle: 3931.59,3264.5 3957.38,3339.9
  rectangle: 3931.59,3314.5 4094.51,3339.94
  region: 4064.55,3499.7 4064.55,3314.5 4094.51,3314.5 4094.51,3499.7
  rectangle net NetC22_2: 3574.8,3200.88 3898.33,3226
  rectangle: 3931.91,3474.86 4094.51,3499.7
  rectangle: 3931.91,3474.86 3957.19,3544.62
  region: 3931.91,3544.62 3931.91,3519.42 3996.28,3519.42 3996.28,3544.62
  rectangle: 3884.15,3363.32 4040.77,3390.68
  rectangle: 4015.1,3363.32 4040.77,3450.41
  rectangle: 3884.98,3425.17 4040.77,3450.41
  rectangle: 3885.02,3439.94 3909.78,3589.78
  region: 3891.59,3589.78 3891.59,3564.26 4050.14,3564.26 4050.14,3589.78
  rectangle net GND: 3741.32,3251 3785.81,3619.46
  region net NetC22_1: 3471.87,3228.01 3471.87,3202.81 3536.24,3202.81 3536.24,3228.01
  region net NetL1_1: 2725,3220 2725,3285 2705,3285 2705,3220
  rectangle net NetL1_1: 2710,3220 2760,3244
  rectangle net NetC7_1: 2649,3224 2689,3450
  pour cut-out: 4151.77,3620.32 3788.11,3620.32 3788.23,2946.46 4151.81,2947.4

## Silkscreen, mask and mechanical layers (free items; w line width, h text height)
Top Overlay:
  circle w6.3: c3581.02,2563.86 r255.91
  circle w6.3: c2899.92,3130.79 r19.69
  circle w6.3: c3096.77,3130.79 r19.69
  circle w6.3: c2998.35,3248.9 r49.21
  lines w6: 3250.32,2268.58 ccw(c3309.37,2268.58) 3309.37,2209.53 3899.92,2209.53 ccw(c3899.92,2268.58) 3958.98,2268.58 3958.98,2859.13 ccw(c3899.92,2859.13) 3899.92,2918.19 3309.37,2918.19 ccw(c3309.37,2859.13) 3250.31,2859.13 3250.32,2268.58
  lines w6.3: 2840.1,3131.56 cw(c2840.1,3092.19) 2879.47,3092.19 ; 2840.87,3130.79 2840.87,3367.01 3155.83,3367.01 3155.83,3130.79 ccw(c3155.83,3091.42) 3116.46,3091.42 ; 2919.61,2225.28 3077.09,2225.28 ; 2919.61,2461.5 2922.11,2461.5 3074.59,2461.5 3077.09,2461.5 ; 3256.39,3678.03 3214.88,3678.03 3214.88,2189.84 3256.47,2189.84 ; 3256.73,2189.64 3256.73,3677.84 ; 3116.46,3091.42 ccw(c3077.09,3091.42) 3077.09,3130.79 2919.61,3130.79 ccw(c2919.61,3091.42) 2880.24,3091.42 2880.24,2205.59 2919.61,2205.59 2919.61,2894.57 3077.09,2894.57 3077.09,2205.59 3116.46,2205.59 3116.46,3091.42
Bottom Overlay:
  circle w6.3: c2703.07,3603.23 r70.87
  circle w6.3: c2703.07,2264.65 r70.87
  circle w6.3: c4041.65,2264.65 r70.87
  circle w6.3: c3309.37,2268.58 r70.87
  circle w6.3: c3309.37,2859.13 r70.87
  circle w6.3: c3899.92,2268.58 r70.87
Mechanical 3:
  lines w6.3: 3740.33,2947.06 3740.33,3620.29 3787.58,3620.29 3787.58,2947.06 3740.33,2947.06
Mechanical 4:
  lines w6.3: 3740.33,2947.06 3740.33,3620.29 4110.41,3620.29 4110.41,2947.06 3740.33,2947.06
Mechanical 5:
  lines w3.94: 3756.08,3143.91 cw(c3756.08,3151.78) 3756.08,3159.66 cw(c3756.08,3151.78) 3756.08,3143.91 ; 3756.08,3313.2 cw(c3756.08,3321.08) 3756.08,3328.95 cw(c3756.08,3321.08) 3756.08,3313.2 ; 3756.08,3423.44 cw(c3756.08,3431.31) 3756.08,3439.19 cw(c3756.08,3431.31) 3756.08,3423.44 ; 3760.02,2951 cw(c3760.02,2958.87) 3760.02,2966.75 cw(c3760.02,2958.87) 3760.02,2951 ; 3760.02,3065.17 cw(c3760.02,3073.04) 3760.02,3080.92 cw(c3760.02,3073.04) 3760.02,3065.17 ; 3760.02,3537.61 cw(c3760.02,3545.49) 3760.02,3553.36 cw(c3760.02,3545.49) 3760.02,3537.61 ; 3763.96,3474.62 cw(c3763.96,3482.49) 3763.96,3490.37 cw(c3763.96,3482.49) 3763.96,3474.62 ; 3767.89,3025.8 cw(c3767.89,3033.67) 3767.89,3041.55 cw(c3767.89,3033.67) 3767.89,3025.8 ; 3767.89,3108.48 cw(c3767.89,3116.35) 3767.89,3124.23 cw(c3767.89,3116.35) 3767.89,3108.48 ; 3767.89,3269.9 cw(c3767.89,3277.77) 3767.89,3285.64 cw(c3767.89,3277.77) 3767.89,3269.9 ; 3767.89,3368.32 cw(c3767.89,3376.19) 3767.89,3384.07 cw(c3767.89,3376.19) 3767.89,3368.32 ; 3767.89,3584.86 cw(c3767.89,3592.73) 3767.89,3600.6 cw(c3767.89,3592.73) 3767.89,3584.86

## Text inside footprints (layer, text, board x,y; h text height)
U4: Mechanical 15 "1" at 3993.45,2738.89 h29.53 r180